# Altium PCB PCB1.PcbDoc
Units mil, origin at the board's own origin, x right, y up, seen from the top; angles counter-clockwise.
Board outline 1496.06 x 1496.06 mil, 2 copper layers (Top Layer, Bottom Layer); 63 components, 56 nets, 168 pads, 104 vias.
Unrouted connection lines stored in the file: 21.
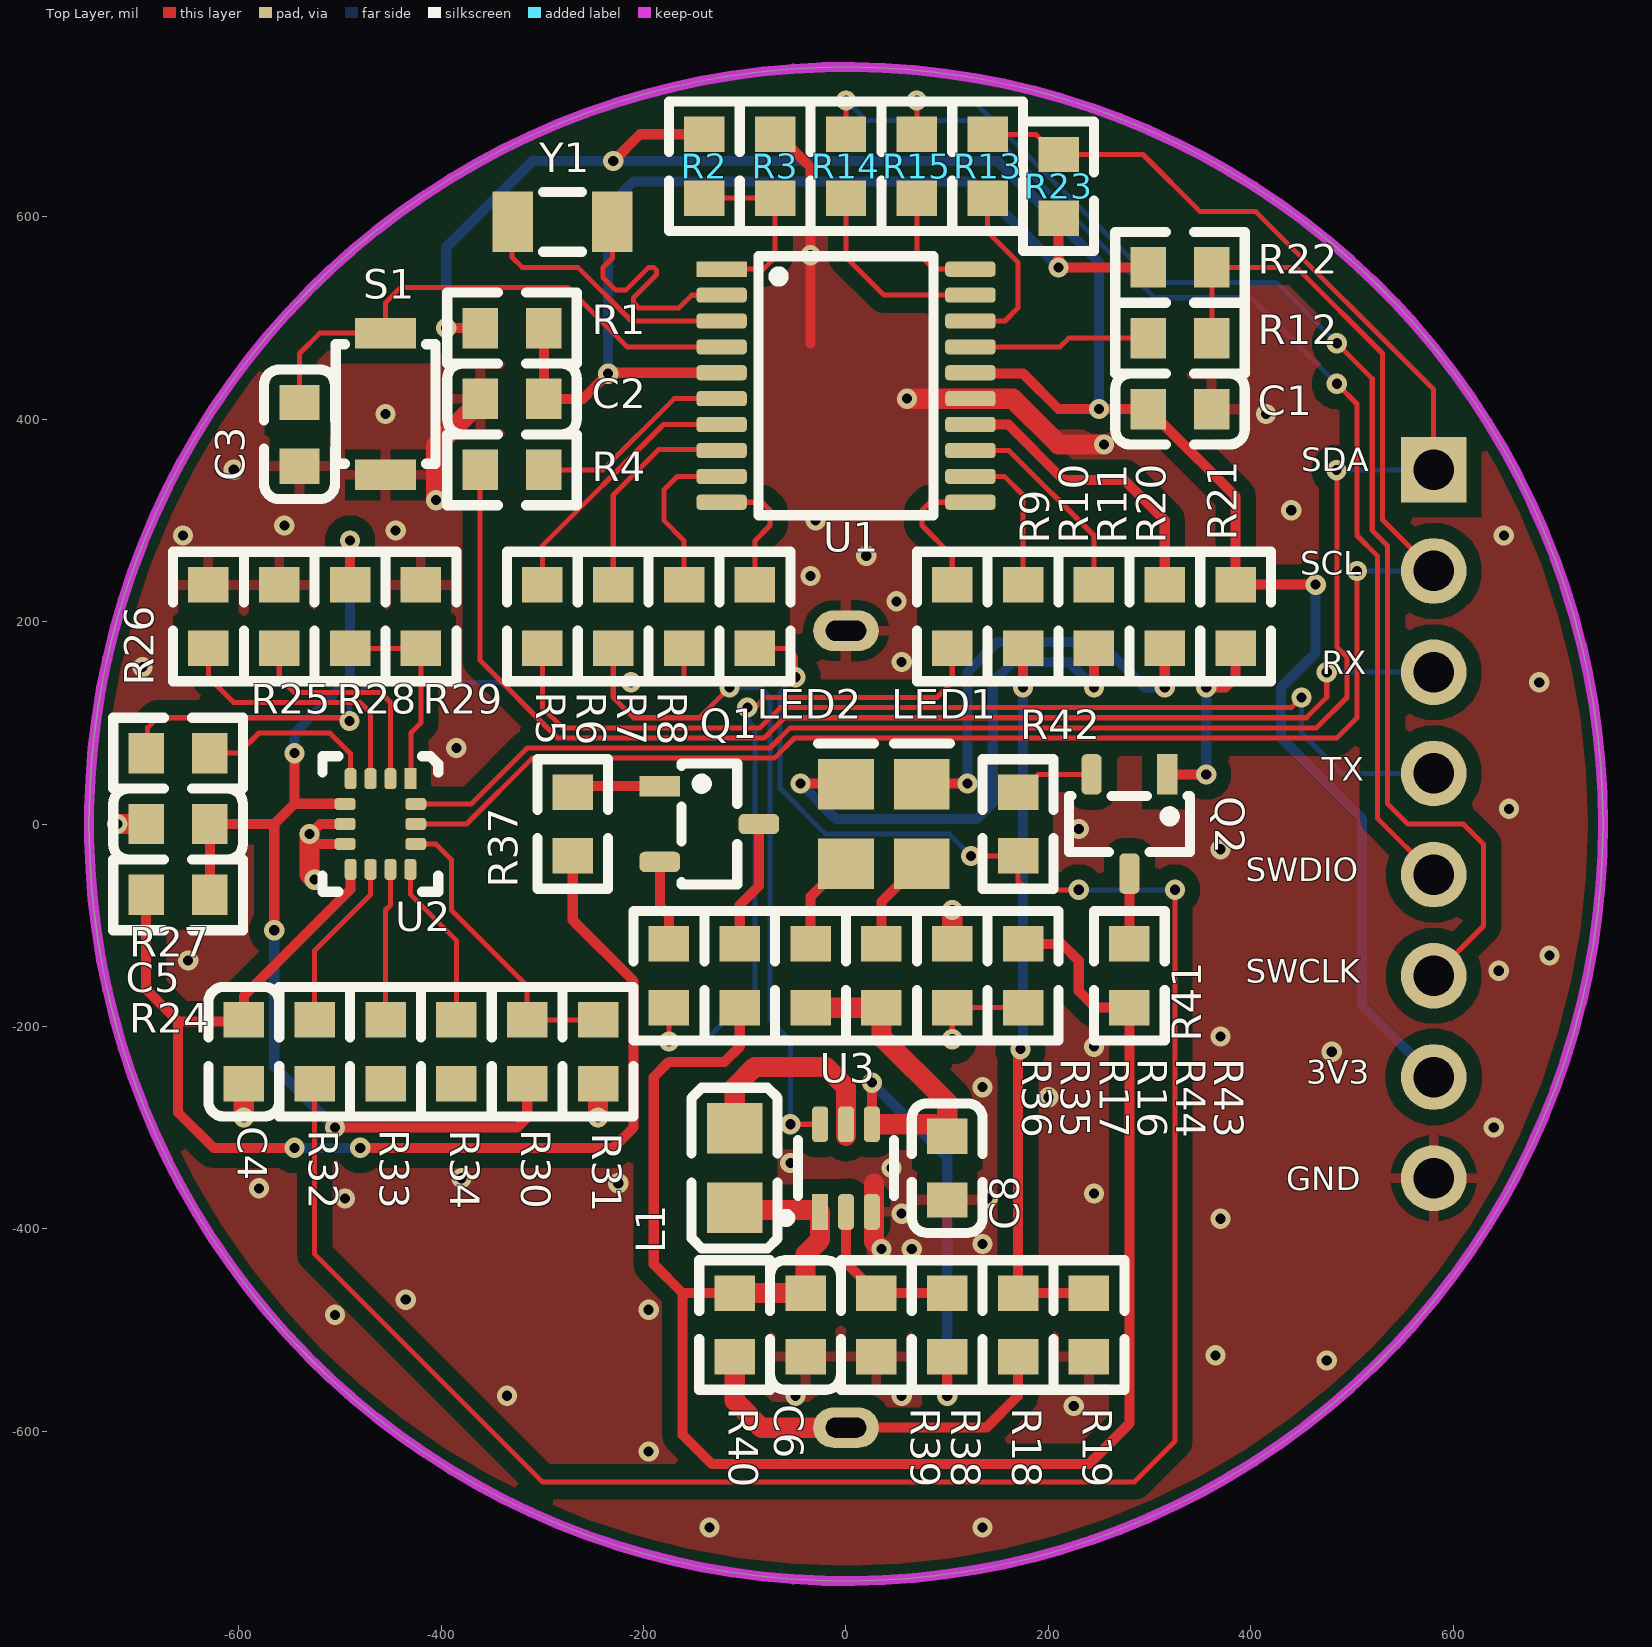
[diagram p0: Top Layer view]
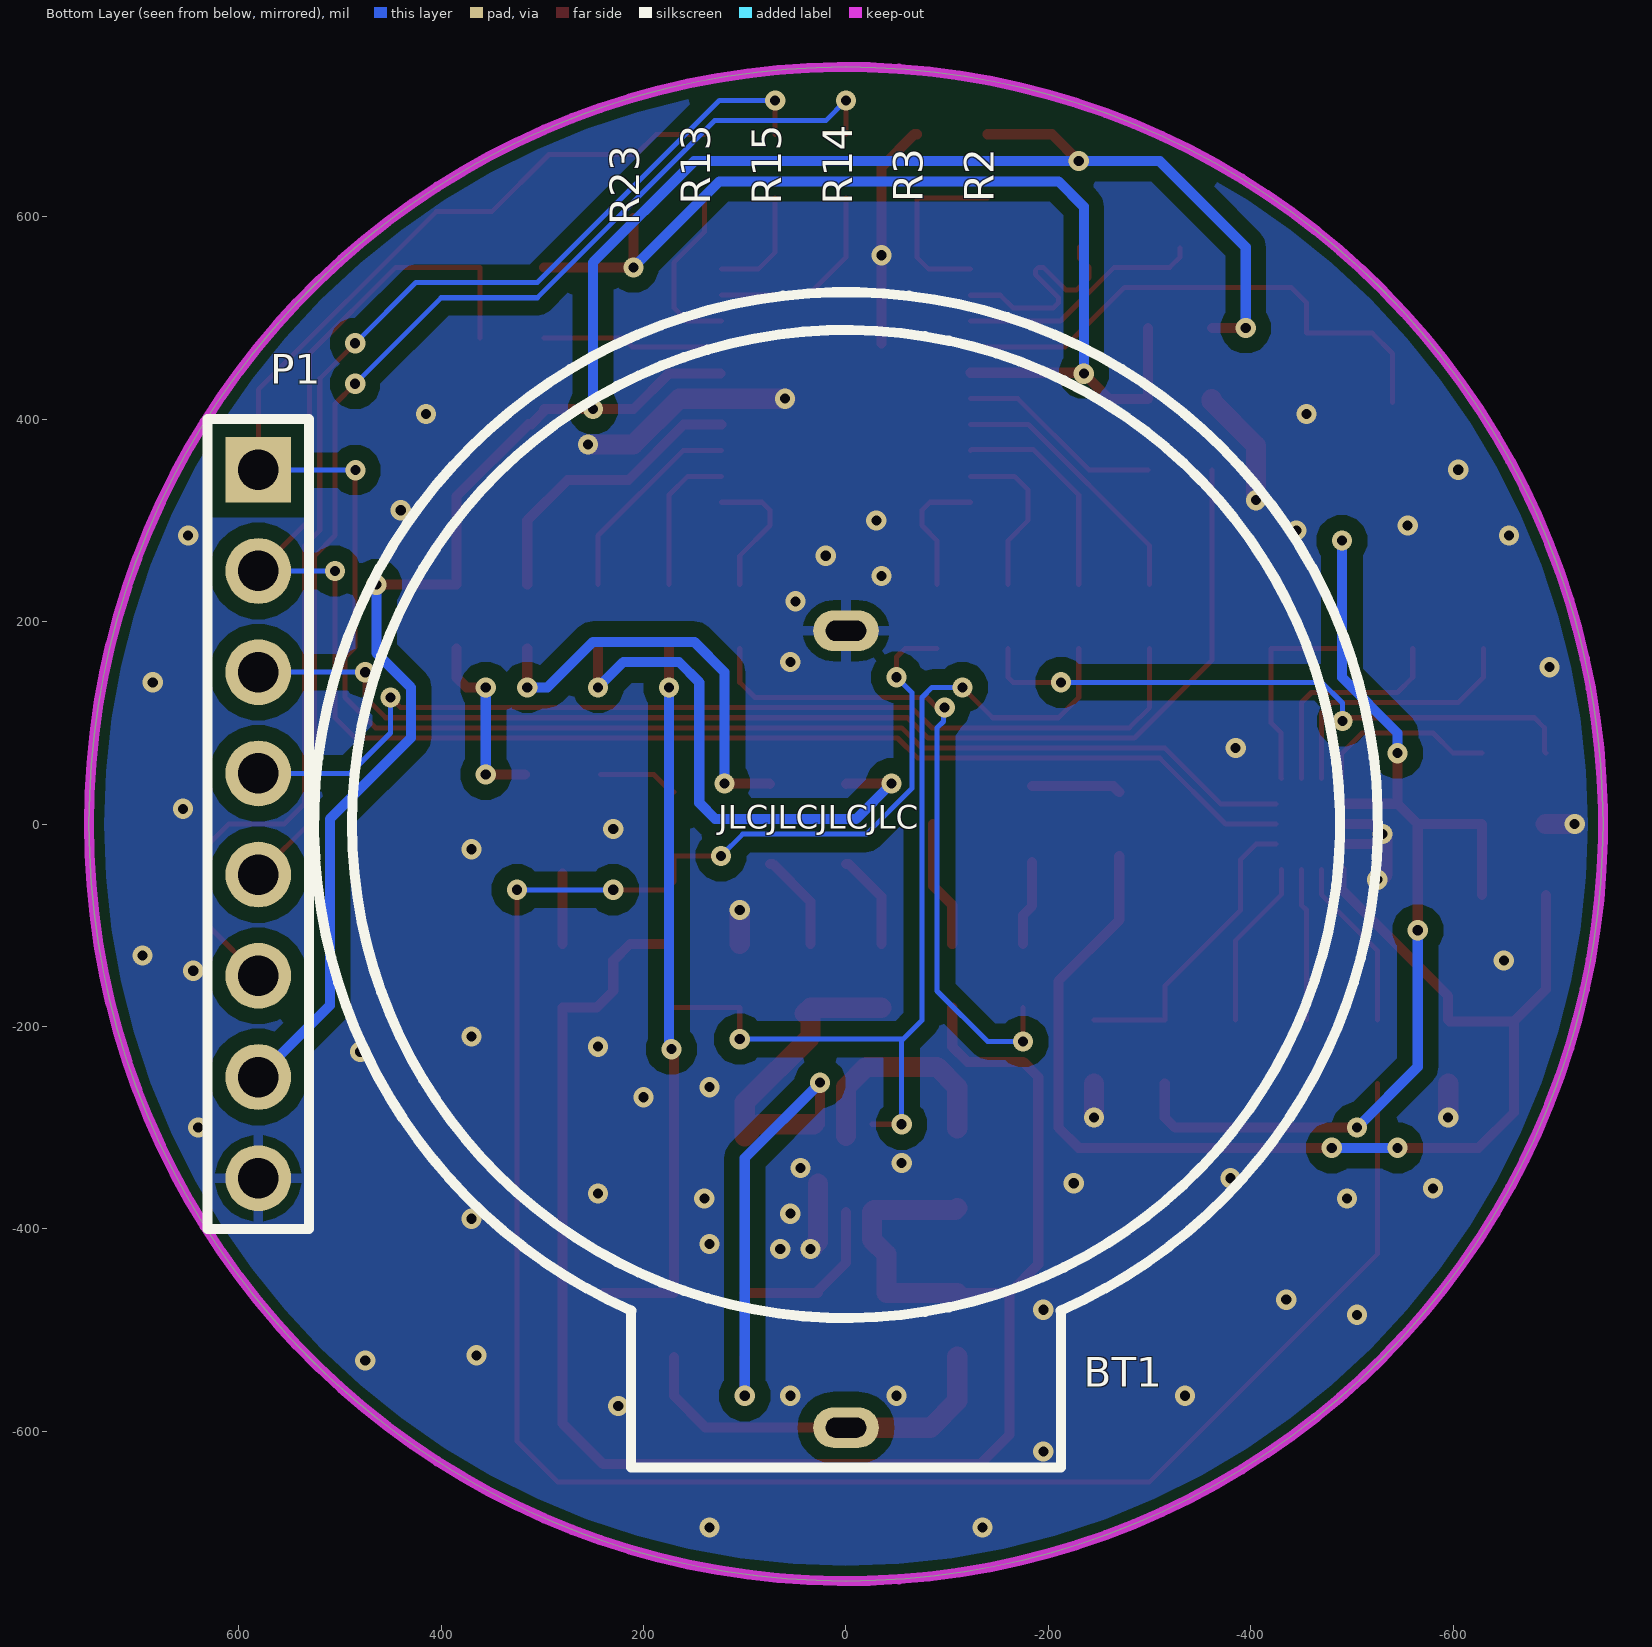
[diagram p1: Bottom Layer view, seen from below]

## Layer stack, top to bottom
Top Solder: solder mask 0.4, Solder Resist, Dk 3.5
Top Layer: signal copper 1.4
Dielectric 1: dielectric 12.6, FR-4, Dk 4.8
Bottom Layer: signal copper 1.4
Bottom Solder: solder mask 0.4, Solder Resist, Dk 3.5

## Board outline
0,-748.03 cw(c0,0) -748.03,0 cw(c0,0) 0,748.03 cw(c0,0) 748.03,0 cw(c0,0)

## Design rules (kind name [scope] priority, off if disabled: settings)
Clearance Clearance_HighV [InNet('24V_OUT')] p1: gap=20 ignorepadtopadclearanceinfootprint=FALSE except(0: Arc-Hole Track-Hole SMDPad-Hole THPad-Hole Via-Hole Fill-Hole Poly-Hole Region-Hole Text-Hole)
Clearance Clearance_PolyBoradEdge [(InPolygon) vs OnLayer('Keep-Out Layer')] p2: gap=10 ignorepadtopadclearanceinfootprint=FALSE except(0: Arc-Hole Track-Hole SMDPad-Hole THPad-Hole Via-Hole Fill-Hole Poly-Hole Region-Hole Text-Hole)
Clearance Clearance_Ploy [(InPolygon)] p3: gap=15 ignorepadtopadclearanceinfootprint=FALSE
Clearance [All] p4: gap=5 ignorepadtopadclearanceinfootprint=FALSE except(0: Arc-Text Track-Text SMDPad-Text THPad-Text Via-Text Fill-Text Poly-Text Region-Text Text-Text Text-Hole)
ComponentClearance [All] p1: gap=-1 collisioncheckmode=3 verticalgap=-1 showdistances=FALSE
HoleSize Testpoint [All] p2: absolutevalues=TRUE maxlimit=100 minlimit=1 maxpercent=80.000 minpercent=20.000
HoleSize TestPointUsage [All] p3: absolutevalues=TRUE maxlimit=100 minlimit=1 maxpercent=80.000 minpercent=20.000
MinimumSolderMaskSliver [All] p1: minsoldermaskwidth=1
PlaneConnect [All] p1: planeconnectstyle=Relief reliefexpansion=20 reliefentries=4 reliefconductorwidth=20 reliefairgap=10
PolygonConnect Via [isVia] p1: connectstyle=Direct reliefconductorwidth=10 reliefentries=4 polygonreliefangle="90 Angle" airgapwidth=10
PolygonConnect PolygonConnect_GND [All vs (InNet('SGND1') OR InNet('SGND2') OR InNet('GND'))] p2: connectstyle=Relief reliefconductorwidth=10 reliefentries=4 polygonreliefangle="90 Angle" airgapwidth=10
PolygonConnect [All vs (InPadClass('All Pads'))] p3: connectstyle=Direct reliefconductorwidth=20 reliefentries=4 polygonreliefangle="90 Angle" airgapwidth=10
RoutingVias [All] p1: holewidth=10 width=20 viastyle="Through Hole" minholewidth=1 minwidth=10 maxholewidth=99999 maxwidth=9999
SilkToSilkClearance [All] p1: silktosilkclearance=-1
SilkToSolderMaskClearance [IsPad] p1: minsilkscreentomaskgap=0 clearancetoexposedcopper=TRUE
SolderMaskExpansion [All] p1: expansion=4 istentingtop=FALSE
Width [All] p1: maxlimit=100 minlimit=5 preferedwidth=10 minimp=50.000000 maximp=50.000000 favimp=50.000000
25 further rules are at their usual default settings.

## Classes and differential pairs
component class U_PWR: BT1 C6 C8 L1 R38 R39 R40 R43 R44 U3
component class U_MMU: C4 C5 Q1 R24 R25 R26 R27 R28 R29 R30 R31 R32 R33 R34 R35 R36 R37 U2
component class U_MCU: C1 C2 C3 LED1 LED2 P1 Q2 R1 R2 R3 R4 R5 R6 R7 R8 R9 R10 R11 R12 R13 R14 R15 R16 R17 R18 R19 R20 R21 R22 R23 R41 R42 S1 U1 Y1

## Components (designator, comment, footprint, x,y, rotation, side; value= is the part's Value field where it differs from the comment)
BT1 "2450" CR2450_CJ 0,0 r90 bottom locked
C1 "10nF" 0603-C 330,410 r180 top
C2 "10nF" 0603-C -330,420 r0 top
C3 "100nF" 0603-C -540,385 r270 top
C4 "100nF" 0603-C -595,-225 r90 top
C5 "100nF" 0603-C -660,0 r0 top
C6 "1uF" 0603-C -40,-495 r90 top
C8 "10uF" 0603-C 100,-340 r90 top
L1 "4.7uH" 0805-L -110,-340 r90 top
LED1 "白光" 0805-LED 75,0 r270 top
LED2 "白光" 0805-LED 0,0 r270 top
P1 "SWD/UART/I2C" "2.54mm 1x8P" 580.71,0 r180 bottom
Q1 "AO3401A" SOT-23-3 -135,0 r0 top
Q2 "AO3401A" SOT-23-3 280,0 r270 top
R1 "0R" 0603-R -330,490 r180 top
R2 "0R" 0603-R -140,650 r270 top
R3 "0R" 0603-R -70,650 r270 top
R4 "0R" 0603-R -330,350 r180 top
R5 "0R" 0603-R -300,205 r270 top
R6 "0R" 0603-R -230,205 r270 top
R7 "0R" 0603-R -160,205 r270 top
R8 "0R" 0603-R -90,205 r270 top
R9 "0R" 0603-R 105,205 r270 top
R10 "0R" 0603-R 175,205 r270 top
R11 "0R" 0603-R 245,205 r270 top
R12 "0R" 0603-R 330,480 r0 top
R13 "0R" 0603-R 140,650 r90 top
R14 "0R" 0603-R 0,650 r90 top
R15 "0R" 0603-R 70,650 r90 top
R16 "75R" 0603-R 35,-150 r270 top
R17 "75R" 0603-R -35,-150 r270 top
R18 "1.1M" 0603-R 170,-495 r270 top
R19 "1M" 0603-R 240,-495 r90 top
R20 "0R" 0603-R 315,205 r90 top
R21 "CTR" 0603-R 385,205 r270 top
R22 "4.7K" 0603-R 330,550 r180 top
R23 "4.7K" 0603-R 210,630 r270 top
R24 "0R" 0603-R -660,-70 r0 top
R25 "0R" 0603-R -560,205 r270 top
R26 "0R" 0603-R -630,205 r270 top
R27 "0R" 0603-R -660,70 r0 top
R28 "4.7K" 0603-R -490,205 r90 top
R29 "4.7K" 0603-R -420,205 r90 top
R30 "4.7K" 0603-R -315,-225 r270 top
R31 "4.7K" 0603-R -245,-225 r270 top
R32 "0R" 0603-R -525,-225 r270 top
R33 "0R" 0603-R -455,-225 r270 top
R34 "0R" 0603-R -385,-225 r270 top
R35 "4.7K" 0603-R -105,-150 r270 top
R36 "4.7K" 0603-R -175,-150 r270 top
R37 "4.7K" 0603-R -270,0 r90 top
R38 "1M" 0603-R 100,-495 r270 top
R39 "200K" 0603-R 30,-495 r90 top
R40 "CTR" 0603-R -110,-495 r270 top
R41 "4.7K" 0603-R 280,-150 r270 top
R42 "4.7K" 0603-R 170,0 r270 top
R43 "10K" 0603-R 175,-150 r90 top
R44 "10K" 0603-R 105,-150 r270 top
S1 "Tact Switch" TS-3025 -455,415 r270 top
U1 "STM32L011F4P6" TSSOP-20 0,433.07 r0 top
U2 "LSM6DSOWTR" LGA-14L(2.5x3.0) -460,0 r270 top
U3 "TPS61220DCKR" SC-70-6 0,-340 r90 top
Y1 "32.768k" SMD3215-2P -280,595 r0 top

## Footprints (in the part's own frame and the unit in brackets; to place one, negate y for a bottom-side part, rotate by r counter-clockwise, add the part's x,y. Pads: shape width x height; smd on the part's side, far side on the other; paste and mask are expansions set on the pad)
"2.54mm 1x8P" [mil]
  rect 65x65 hole 40: 1(0,350)
  round 65 hole 40: 2(0,250) 3(0,150) 4(0,50) 5(0,-50) 6(0,-150) 7(0,-250) 8(0,-350)
  silkscreen extent -50,-400 50,400
0603-C [mil]
  rect 35x40 smd: 1(-31.5,0) 2(31.5,0)
  silkscreen extent -64,-35 64,35, body extent -31,-15 31,15, height 30
0603-R [mil]
  rect 35x40 smd: 1(-31.5,0) 2(31.5,0)
  silkscreen extent -64,-35 64,35, body extent -35,-19 35,19, height 33
0805-L [mil]
  rect 50x55 smd: 1(-39.37,0) 2(39.37,0)
  silkscreen extent -79,-43 79,43
0805-LED [mil]
  rect 50x55 smd: 1(-39.37,0) 2(39.37,0)
  silkscreen extent -79,-28 -79,27, body extent -41,-18 41,18, height 33
CR2450_CJ [mil]
  oval 40x65 hole 20 slot 40 at 90 deg: 1(-596.46,0) 2(190.94,0)
  silkscreen extent -636,-526 525,526
LGA-14L(2.5x3.0) [mm]
  rect 0.525x0.3 smd mask+0.07: 1(-1.138,0.75)
  rrect50% 0.525x0.3 smd mask+0.07: 2(-1.138,0.25) 3(-1.138,-0.25) 4(-1.138,-0.75) 8(1.138,-0.75) 9(1.138,-0.25) 10(1.138,0.25) 11(1.138,0.75)
  rrect50% 0.3x0.526 smd mask+0.07: 5(-0.5,-0.887) 6(0,-0.887) 7(0.5,-0.887)
  rrect50% 0.3x0.525 smd mask+0.07: 12(0.5,0.887) 13(0,0.887) 14(-0.5,0.887)
  silkscreen extent -1.7,-1.45 1.7,1.45, body extent -1.5,-1.25 1.5,1.25, height 0.91
SC-70-6 [mm]
  rect 0.9x0.4 smd: 1(-1.1,0.65)
  rrect50% 0.9x0.4 smd: 2(-1.1,0) 3(-1.1,-0.65) 4(1.1,-0.65) 5(1.1,0) 6(1.1,0.65)
  silkscreen extent -1.35,-1.2 0.7,1.6
SMD3215-2P [mil]
  rect 40x60 smd: 1(-49.21,0) 2(49.21,0)
  silkscreen extent -19,-30 19,30, body extent -63,-30 63,30, height 30
SOT-23-3 [mil]
  rect 40x20 smd: 1(-48.97,37.4)
  rrect50% 40x20 smd: 2(-48.97,-37.4) 3(48.97,0)
  silkscreen extent -28,-60 28,60, body extent -47,-57 47,57, height 44
TS-3025 [mil] "XKB"
  rect 30x60 smd: 1(-70,0) 2(70,0)
  silkscreen extent -59,-49 59,49, body extent -79,-49 79,49, height 59
TSSOP-20 [mil]
  rect 50x15 smd: 1(-122.95,115.16)
  rrect50% 50x15 smd: 2(-122.95,89.57) 3(-122.95,63.98) 4(-122.95,38.39) 5(-122.95,12.8) 6(-122.95,-12.8) 7(-122.95,-38.39) 8(-122.95,-63.98) 9(-122.95,-89.57) 10(-122.95,-115.16) 11(122.95,-115.16) 12(122.95,-89.57) 13(122.95,-63.98) 14(122.95,-38.39) 15(122.95,-12.79) 16(122.95,12.8) 17(122.95,38.39) 18(122.95,63.98) 19(122.95,89.57) 20(122.95,115.16)
  silkscreen extent -87,-128 87,128, body extent -126,-128 126,128, height 47

## Part data
BT1: library part Battery, "Multicell Battery", LatestRevisionDate=17-Jul-2002, LatestRevisionNote="Re-released for DXP Platform.", PackageDescription="Battery; 2 Leads", PackageReference=BAT-2, Published=24-Mar-1999, Publisher="Altium Limited"
C1 C2 C3 C4 C5 C6 C8: library part Cap
L1: library part Inductor
LED1 LED2: library part LED
P1: library part "Header 1x8P"
Q1 Q2: library part MOSFET-P
R1 R2 R3 R4 R5 R6 R7 R8 R9 R10 R11 R12 R13 R14 R15 R16 R17 R18 R19 R20 R21 R22 R23 R24 R25 R26 R27 R28 R29 R30 R31 R32 R33 R34 R35 R36 R37 R38 R39 R40 R41 R42 R43 R44: library part Res
U1: "Ultra-low-power 32-bit MCU Arm®-based /  Cortex®-M0+, 16KB Flash, 2KB SRAM, 512B EEPROM, ADC/TSSOP-20"
U2: "6-axis IMU (inertial measurement unit):  / always-on 3‑axis accelerometer and 3‑axis gyroscop"
U3: "TPS6122x Low Input Voltage, 0.7V Boost Converter With 5.5μA Quiescent Current"
Y1: library part XTAL

## Via types
v1: diameter 20, hole 10, Top Layer to Bottom Layer, tented both sides, 104 vias

## Nets (pads, with @x,y where several pads share a name; then routed paths per layer and width w, separated by ;. In a path a pad name is that pad's centre, name@x,y a point inside that pad or via, vN(x,y) a via of type N, cw(c..) or ccw(c..) an arc to the next point about the centre after c; other vN are vias at no path point)
BAT+: BT1.1 R18.2 R40.2 | length 386
  Top Layer w10: BT1.1 138.54,-596.46 170,-565 R18.2
  Top Layer w20: R40.2 -110,-570 -83.54,-596.46 BT1.1
DC_FB: R38.1 R39.2 U3.2 | length 165.1
  Top Layer w10: U3.2 0,-433.5 R39.2 ; R39.2@27.5,-463.5 R39.2 ; R38.1 R39.2
GND: BT1.2 C1.1 C2.1 C3.2 C4.1 C5.1 C6.1 C8.1 P1.8 R3.1 R19.1 R25.1 R26.1 R29.2 R31.2 R39.1 R44.1 S1.2 U1.15 U2.6 U2.7 U3.3 | length 871.1
  Top Layer w10: v1@-532.73,-12.73 -532.25,-12.73 -519.52,0 U2.6 ; -525,-19.68 U2.7 ; R3.1 -67.5,681.5 -35,649 -35,475
  Top Layer w20: v1(-720,0) C5.1 ; v1(-595,-290) C4.1 ; v1(-530,-10) -530,-50 v1(-525,-55) ; v1(-405,320) -405,374 -361.5,417.5 C2.1 ; v1(-245,-290) R31.2 ; 27.72,-355.53 27.72,-412.72 v1(35,-420) ; v1@60,420 v1(60.28,420.28) 164.72,420.28 210,375 v1(255,375) ; R44.1 v1(105,-85)
  other v1: -135,-695 135,-695 -195,-620 225,-575 -335,-565 -50,-565 55,-565 475,-530 365,-525 -505,-485 -195,-480 -435,-470 65,-420 135,-415 370,-390 55,-385 -495,-370 140,-370 245,-365 -580,-360 -225,-355 -380,-350 45,-340 -55,-335 640,-300 200,-270 135,-260 480,-225 245,-220 370,-210 645,-145 -650,-135 695,-130 370,-25 230,-5 655,15 -385,75 685,140 -695,155 55,160 50,220 -35,245 20,265 -655,285 650,285 -445,290 -555,295 -30,300 440,310 -605,350 -455,405 415,405 -35,562
LED_EN_1: LED1.1 R20.1 | length 419.8
  Top Layer w10: LED1.1 75.63,40 v1(120,40) ; v1(315,135) R20.1
  Bottom Layer w10: v1(120,40) 120,150 150,180 250,180 295,135 v1(315,135)
LED_EN_2: LED2.1 R11.2 | length 532.6
  Top Layer w10: v1(-45,40) -0.63,40 LED2.1 ; v1(245,135) R11.2
  Bottom Layer w10: v1(-45,40) -10,5 129.14,5 145,20.86 145,140 165,160 220,160 v1(245,135)
LSM_CS: R30.1 R31.1 U2.12 | length 301
  Top Layer w5: U2.12 -405.32,-19.68 -390,-35 -390,-85 -315,-160 R30.1 R31.1
LSM_EN: R9.2 R36.2 | length 676.2
  Top Layer w5: v1(-175,-215) R36.2 ; v1@-105,115 v1(-97.5,115) -90,115 -80,125 90,125 105,140 R9.2
  Bottom Layer w5: v1(-175,-215) -140,-215 -90,-165 -90,95 -96.38,101.38 -96.38,113.88 v1(-97.5,115)
LSM_INT1: R27.2 U2.4 | length 180.5
  Top Layer w5: R27.2 -600,70 -580,90 -510,90 -489.53,69.53 U2.4
LSM_INT2: R32.1 U2.9 | length 171.5
  Top Layer w5: R32.1 -525,-125 -469.84,-69.84 U2.9
LSM_OCS_Aux: R33.1 U2.10 | length 150.7
  Top Layer w5: R33.1 -455,-85 -450.16,-80.16 U2.10
LSM_SCx: R26.2 U2.3 | length 268.3
  Top Layer w5: R26.2 -630,145 -605,120 -480,120 -469.84,109.84 U2.3
LSM_SDO/SA0: R28.1 R29.1 U2.1 | length 203.1
  Top Layer w5: R28.1 R29.1 -420,100 -430,90 -430,45.26 U2.1
LSM_SDO_Aux: R34.1 U2.11 | length 167.5
  Top Layer w5: U2.11 -430.47,-69.53 -385,-115 R34.1
LSM_SDx: R25.2 U2.2 | length 224.1
  Top Layer w5: R25.2 -560,145 -545,130 -460,130 -450,120 -450,44.96 U2.2
LSM_SI2C_SCL: P1.2 R12.2 R22.1 U2.13 | length 1704
  Top Layer w5: U2.13 -375,0 -310,65 -70.86,65 -50.86,85 485,85 505,105 v1(505,250) ; R12.2 R22.1 445,550 530,465 530,300.71 P1.2
  Bottom Layer w5: v1(505,250) P1.2
LSM_SI2C_SDA: P1.1 R13.2 R23.1 U2.14 | length 1913.1
  Top Layer w5: U2.14 -370.32,19.68 -315,75 -75,75 -55,95 465,95 495,125 495,165 485,175 v1@485,349.6 ; R13.2 187.5,681.5 207.5,661.5 R23.1 293.5,661.5 350,605 405,605 580.71,429.29 P1.1
  Bottom Layer w5: v1(484.7,349.6) 580.31,349.6 P1.1
LSM_SINT1: R7.2 R27.1 | length 617.3
  Top Layer w5: R27.1 -690,71.5 -690,95.2 -680.2,105 v1@-490,105 ; v1(-212.5,140) -165,140 -160,145 R7.2
  Bottom Layer w5: v1(-490.49,101.66) -490.49,119.51 -470,140 v1(-212.5,140)
LSM_SINT2: R8.2 R32.2 R42.2 | length 2299.2
  Top Layer w5: R32.2 -525,-425 -300,-650 285,-650 325,-610 v1(325,-65) ; R8.2 -58.5,173.5 -50,165 v1(-50,145) ; v1(123.5,-31.5) R42.2 170,-56.8 178.2,-65 v1(230,-65)
  Bottom Layer w5: v1(-50,145) -65,130 -65,35 -20,-10 102.01,-10 v1(123.5,-31.5) ; v1(230,-65) v1(325,-65)
LSM_VDD: C4.2 R24.1 R37.1 U2.8 | length 1252.2
  Top Layer w10: R24.1 -691.5,-163.5 -660,-195 ; v1(-545,-320) -625,-320 -660,-285 -660,-195 ; U2.8 -489.53,-64.53 -595,-170 C4.2 -596.5,-195 -660,-195 ; v1(-480,-320) -230,-320 -210,-300 -210,-155 -270,-95 R37.1
  Bottom Layer w10: v1(-545,-320) v1(-480,-320)
LSM_VDDIO: C5.2 R24.2 R28.2 R30.2 U2.5 | length 1090.8
  Top Layer w10: R24.2 C5.2 -565,0 ; v1(-565,-105) -565,0 ; v1(-545,70) -545,20 ; v1(-505,-300) -325,-300 -315,-290 R30.2 ; U2.5 -495.24,20 -545,20 ; R28.2 v1(-490,280) ; -565,0 -545,20
  Bottom Layer w10: v1(-565,-105) -565,-240 v1(-505,-300) ; v1(-545,70) -545,90 -490,145 v1(-490,280)
MCU_BOOT: R2.2 R3.2 U1.1 | length 186.3
  Top Layer w5: R2.2 R3.2 -70,560 -81.77,548.23 U1.1
MCU_OSC32_IN: U1.2 Y1.2 | length 238.4
  Top Layer w5: Y1.2@-230.79,570 -230.79,559.21 -240,550 -240,540 -227.5,527.5 -217.5,527.5 -195,550 -190,550 -187.07,547.07 -187.07,542.93 -210,520 -210,515 -205,510 -165,510 -152.52,522.48 -123.11,522.48 U1.2
MCU_OSC32_OUT: U1.3 Y1.1 | length 242.3
  Top Layer w5: Y1.1@-330,569.21 -330,560 -320,550 -265,550 -212.05,497.05 U1.3
MCU_PA0: R4.1 U1.6 | length 204.7
  Top Layer w5: R4.1 -240,350 -169.72,420.28 U1.6
MCU_PA1: R5.1 U1.7 | length 265.1
  Top Layer w5: R5.1 -300,275 -180.32,394.68 U1.7
MCU_PA2: R6.1 U1.8 | length 214.6
  Top Layer w5: R6.1 -230,325 -185,370 -123.86,370 U1.8
MCU_PA3: R7.1 U1.9 | length 164.4
  Top Layer w5: R7.1 -160,280 -180,300 -180,330 -166.5,343.5 U1.9
MCU_PA4: R8.1 U1.10 | length 130.9
  Top Layer w5: U1.10 -82.91,317.91 -75,310 -75,295 -90,280 R8.1
MCU_PA5: R9.1 U1.11 | length 137.2
  Top Layer w5: R9.1 105,265 75,295 75,310 82.91,317.91 U1.11
MCU_PA6: R10.1 U1.12 | length 148.2
  Top Layer w5: U1.12 156.5,343.5 175,325 R10.1
MCU_PA7: R11.1 U1.13 | length 205.4
  Top Layer w5: U1.13 160.91,369.09 245,285 R11.1
MCU_PA9: R12.1 U1.17 | length 179.1
  Top Layer w5: U1.17 211.46,471.46 220,480 R12.1
MCU_PA10: R13.1 U1.18 | length 173.3
  Top Layer w5: U1.18 157.05,497.05 170,510 170,555 140,585 R13.1
MCU_PA13: R14.1 U1.19 | length 196.9
  Top Layer w5: R14.1 0,560 37.36,522.64 U1.19
MCU_PA14: R15.1 U1.20 | length 113.4
  Top Layer w5: R15.1 70,565 86.77,548.23 U1.20
MCU_PB1: R20.2 U1.14 | length 294.8
  Top Layer w10: U1.14 160.31,394.69 215,340 275,340 315,300 R20.2
MCU_SWCLK: P1.6 R15.2 | length 1285.6
  Top Layer w5: R15.2 v1(70,715) ; v1(485,475) 520,440 520,290 535,275 535,20 555,0 610,0 630,-20 630,-100.71 P1.6
  Bottom Layer w5: v1(70,715) 125,715 305,535 425,535 v1(485,475)
MCU_SWDIO: P1.5 R14.2 | length 1159.1
  Top Layer w5: R14.2 v1(0,715) ; v1(485,435) 505,415 505,285 525,265 525,5.71 P1.5
  Bottom Layer w5: v1(0,715) 20,695 130,695 305,520 400,520 v1(485,435)
MCU_VDD: C1.2 P1.7 R1.2 R2.1 R21.1 U1.16 | length 2124.4
  Top Layer w5: U1.16 U1.16@123.82,445
  Top Layer w10: v1(-395,490) R1.2 ; v1(-230,655) -203.5,681.5 R2.1 ; U1.16@123.82,445 175,445 210,410 v1(250,410) C1.2 298.5,407.5 311,395 313.5,395 385,323.5 R21.1 v1(464.07,236.5)
  Bottom Layer w10: v1(-395,490) -395,570 -310,655 v1(-230,655) 150,655 250,555 v1(250,410) ; v1(464.07,236.5) 464.07,169.07 430,135 430,85 510,5 510,-179.29 P1.7
MCU_VDDA: C2.2 R1.1 R22.2 R23.2 U1.5 | length 1048.8
  Top Layer w10: R1.1 C2.2 -260,420 -234.13,445.87 U1.5 ; R23.2 v1(210,550) R22.2
  Bottom Layer w10: v1(-235,445) -235,610 -210,635 125,635 v1(210,550)
NetL1_2: L1.2 U3.5 | length 215.2
  Top Layer w20: L1.2 -110,-260 -90,-240 -20,-240 0,-260 U3.5 U3.5@0,-308.01
NetLED1_2: LED1.2 R16.1 | length 97.2
  Top Layer w10: R16.1 35,-76.87 72.5,-39.37 LED1.2
NetLED2_2: LED2.2 R17.1 | length 95.1
  Top Layer w10: R17.1 -35,-71.87 -2.5,-39.37 LED2.2
NetQ1_1: Q1.1 R37.2 | length 88.5
  Top Layer w10: R37.2 -264.09,37.4 Q1.1
NetQ1_2: Q1.2 R36.1 | length 84.8
  Top Layer w10: Q1.2 -183.97,-81.03 -175,-90 R36.1
NetQ1_3: Q1.3 R35.1 | length 126.4
  Top Layer w10: R35.1 -105,-80 -86.03,-61.03 Q1.3
NetQ2_1: Q2.1 R21.2 | length 187.2
  Top Layer w10: Q2.1 v1(355.91,48.97) ; v1@355,135 375,135 385,145 R21.2
  Bottom Layer w10: v1(355.91,48.97) v1(355.91,135)
NetQ2_2: Q2.2 R42.1 | length 79.8
  Top Layer w5: R42.1 172.5,31.5 189.97,48.97 Q2.2
NetQ2_3: Q2.3 R41.1 | length 69.5
  Top Layer w10: R41.1 Q2.3
NRST: C3.1 S1.1 U1.4 | length 534.3
  Top Layer w5: C3.1 -540,465 -520,485 S1.1 -455,515 -440,530 -275,530 -216.46,471.46 U1.4
UART1_RX: P1.3 R4.2 | length 1203.8
  Top Layer w5: R4.2 -361.5,161.5 -285,85 -80.86,85 -60.86,105 454.75,105 475,125.25 v1(475,150)
  Bottom Layer w5: v1(475,150) P1.3
UART1_TX: P1.4 R5.2 | length 1001.5
  Top Layer w5: R5.2 -300,115 -280,95 -85,95 -65,115 440,115 v1(450,125)
  Bottom Layer w5: 450,115 450,90 490,50 P1.4
VBAT: C6.2 L1.1 R35.2 R40.1 R41.2 R43.2 U3.1 | length 1821.9
  Top Layer w10: R40.1 -161.5,-463.5 ; R35.2 -105,-220 -120,-235 -175,-235 -190,-250 -190,-435 -161.5,-463.5 ; R43.2 213.5,-118.5 230,-135 230,-165 246.5,-181.5 R41.2 280,-592.5 240,-632.5 -132.5,-632.5 -161.5,-603.5 -161.5,-463.5
  Top Layer w20: R40.1 C6.2 -40,-425 -25.59,-410.59 U3.1 ; L1.1 -108.03,-381.34 U3.1@-27.56,-381.34
VBAT_CMP: R10.2 R18.1 R19.2 | length 709.1
  Top Layer w10: v1@170,-225 R18.1 R19.2 ; v1(175,135) R10.2
  Bottom Layer w10: v1@170,-225 175,-220 v1(175,135)
  other v1: 172.5,-222.5
VBOOT: C8.2 R16.2 R17.2 R38.2 U3.4 | length 712.9
  Top Layer w10: U3.4 v1(25.59,-255.59) ; v1(100,-565) R38.2
  Top Layer w20: R17.2 R16.2 ; U3.4@31.52,-296.69 C8.2@85.69,-296.69 ; R16.2@40.71,-187.21 R16.2 ; C8.2@95.12,-303.63 C8.2 100,-275 35,-210 R16.2
  Bottom Layer w10: v1(25.59,-255.59) 100,-330 v1(100,-565)
VBOOT_EN: R6.2 R43.1 R44.2 U3.6 | length 950.2
  Top Layer w5: R6.2 -230,125 -210,105 -145,105 v1(-115,135) ; v1(-55,-296.69) U3.6 ; v1(105,-212.6) R44.2 R43.1
  Bottom Layer w5: v1(-115,135) -85,135 -75,125 -75,-194 -55,-214 ; v1(-55,-296.69) -55,-214 ; v1(105,-212.6) -55,-212.6 -55,-214
pads on no net: R33.2 R34.2

## Polygon pours and split planes (outlines as drawn)
GND on Top Layer "GND_T" (solid, remove dead copper, pour order 0): -285,785 -765,305 -765,-315 -315,-765 315,-765 760,-320 760,320 295,785
GND on Bottom Layer "GND_B" (solid, remove dead copper, pour order 1): -285,785 -765,305 -765,-315 -315,-765 315,-765 760,-320 760,320 295,785

## Keep-outs
Keep-Out Layer:
  circle w10: c0,0 r748.03

## Silkscreen, mask and mechanical layers (free items; w line width, h text height)
Top Overlay:
  text "SDA" at 450,340.44 h40
  text "SCL" at 448.89,238.48 h40
  text "RX" at 470,140 h40
  text "TX" at 470,35 h40
  text "SWDIO" at 395,-64.56 h40
  text "SWCLK" at 395,-164.56 h40
  text "3V3" at 455,-264.56 h40
  text "GND" at 435,-369.56 h40
Bottom Overlay:
  text "JLCJLCJLCJLC" at 126.13,-12.8 h40
Mechanical 1:
  circle w10: c0,0 r748.03
Drill Drawing:
  text ".Legend" at 860,27.51 h40